# Altium PCB Bottom_Cell.PcbDoc
Units mm, origin at the board's own origin, x right, y up, seen from the top; angles counter-clockwise.
Board outline 257.2 x 91.2 mm, 4 copper layers (L1, L2, L3, L4), stack 0.603 mm thick; 151 components, 82 nets, 413 pads, 0 vias.
Unrouted connection lines stored in the file: 311.
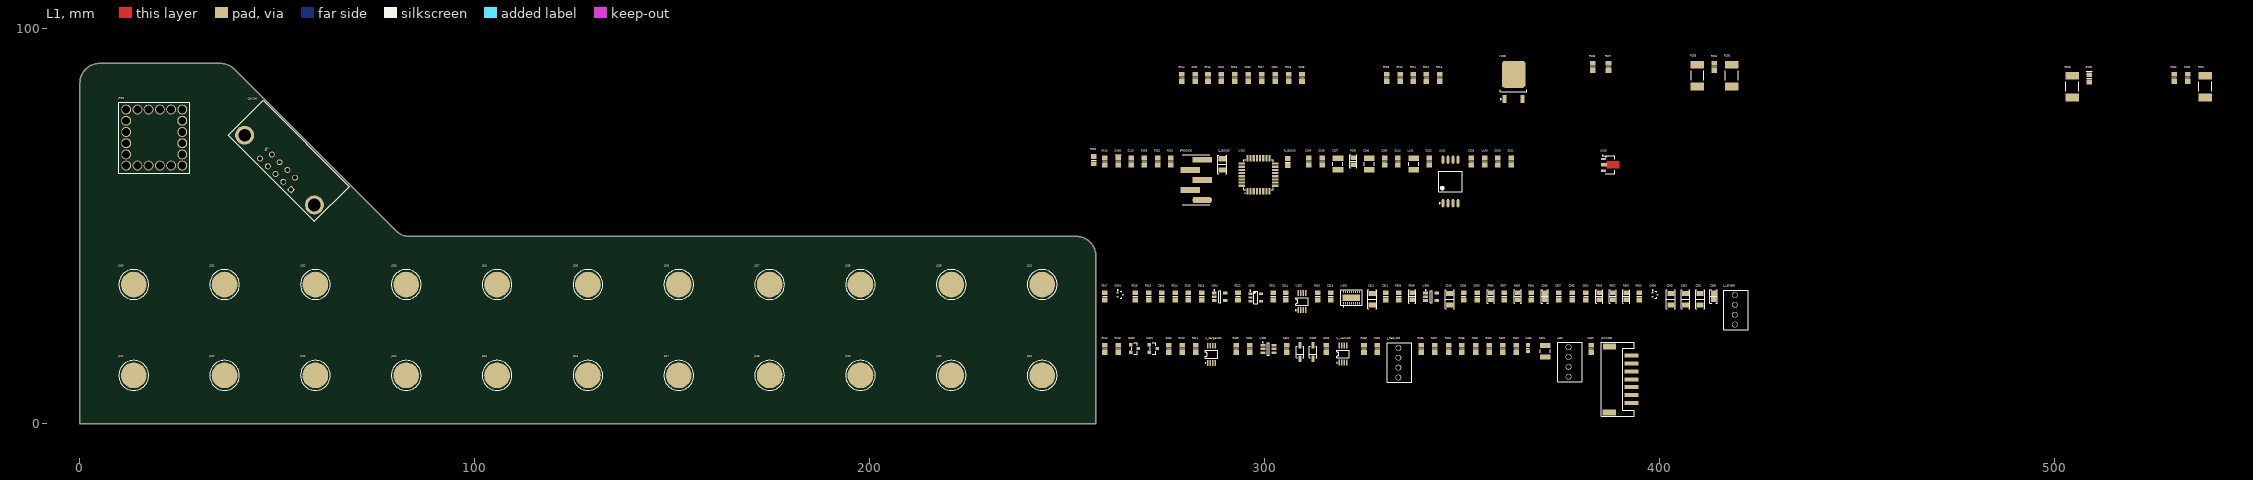
[diagram p0: L1 view]
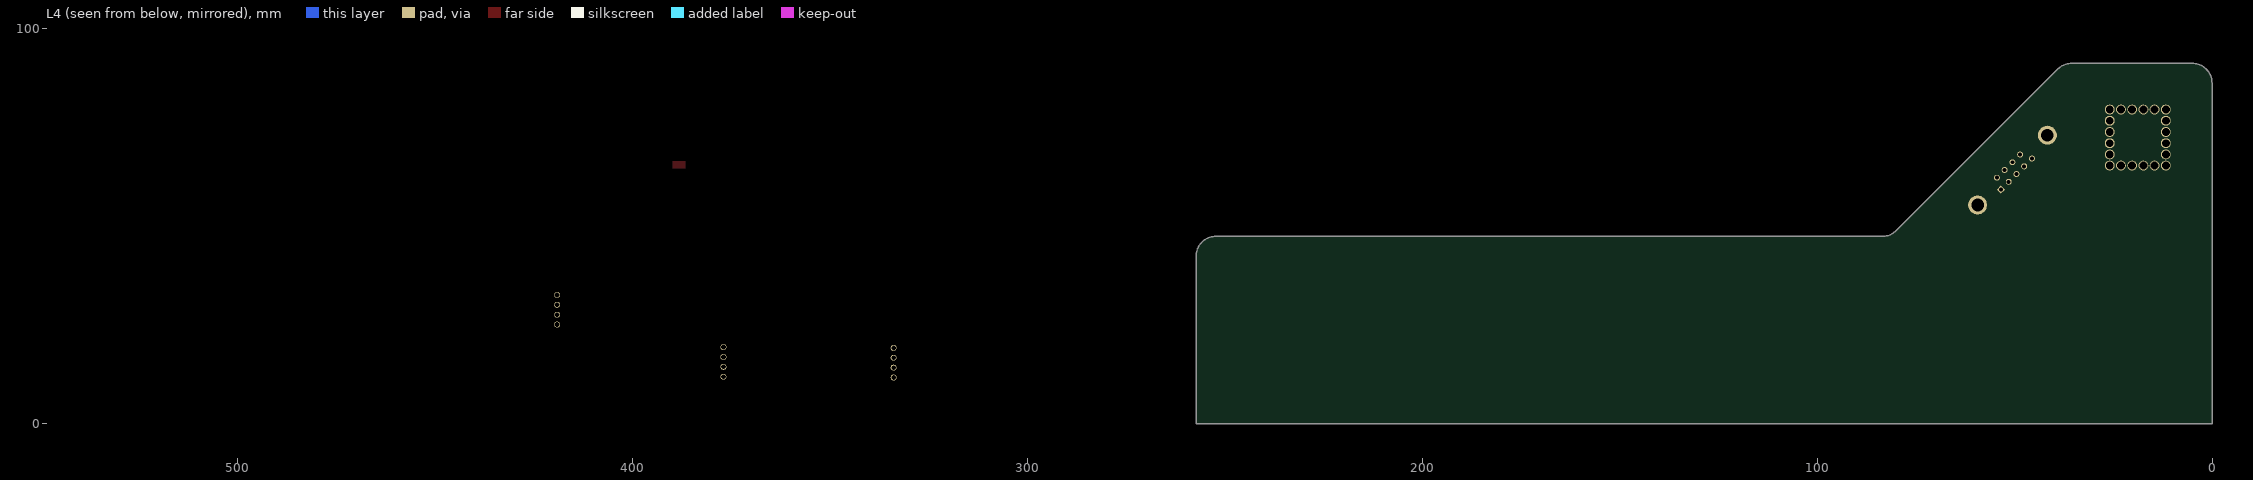
[diagram p1: L4 view, seen from below]
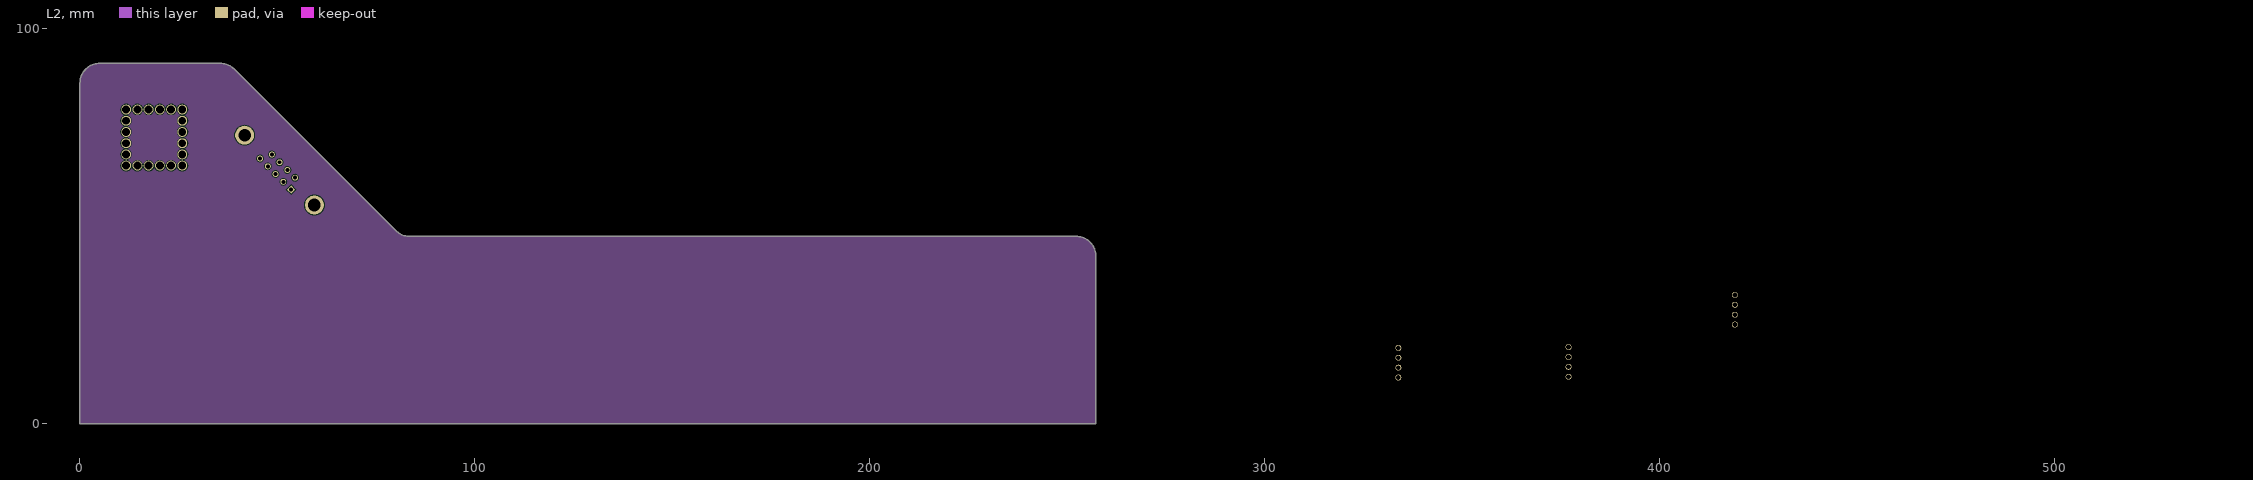
[diagram p2: L2]
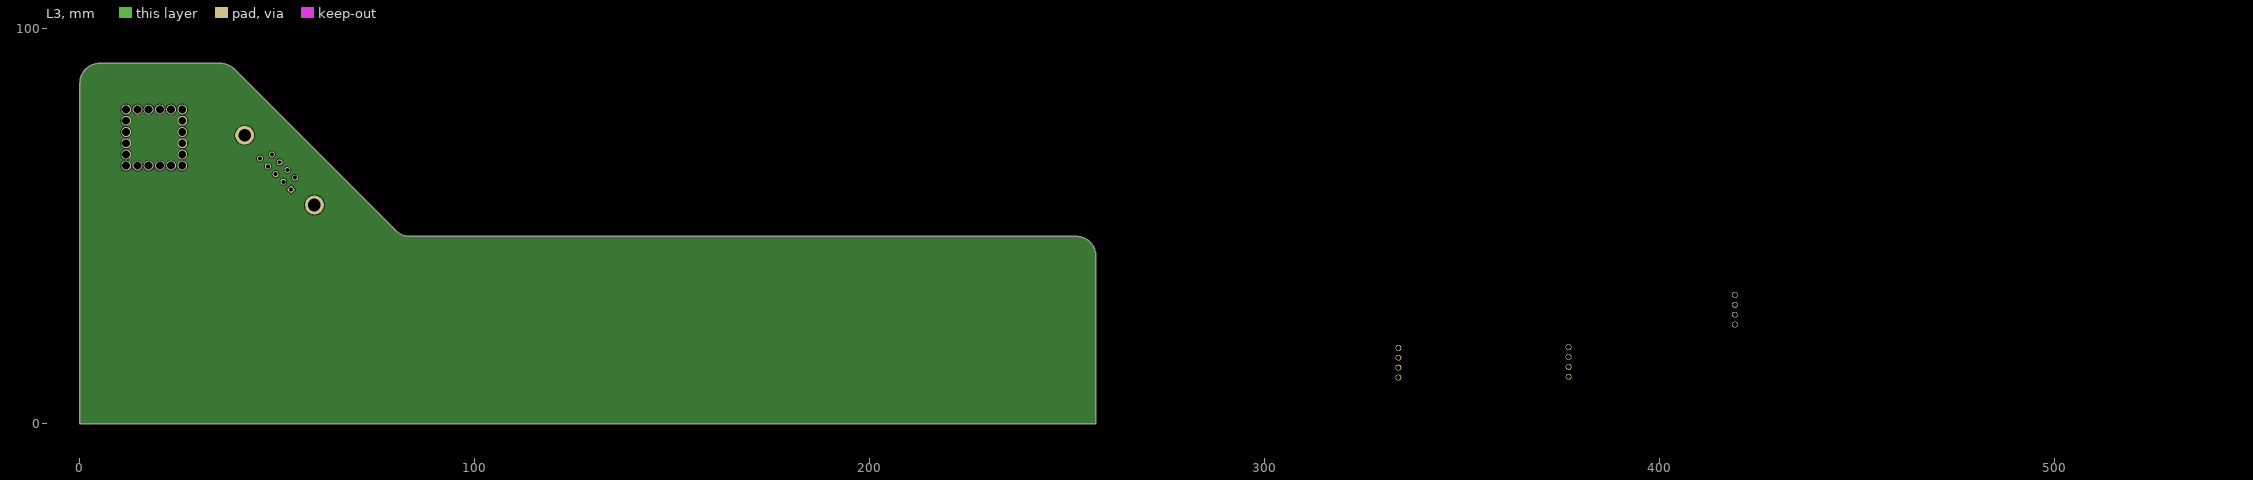
[diagram p3: L3]

## Layer stack, top to bottom
Top Solder: solder mask 0.0102, Solder Resist, Dk 3.5
L1: signal copper 0.0356
Dielectric 2: prepreg 0.0711, PP-006, Dk 4.1
L2: signal copper 0.035
Dielectric 1: dielectric 0.32, FR-4, Dk 4.8
L3: signal copper 0.035
Dielectric 3: prepreg 0.0711, PP-006, Dk 4.1
L4: signal copper 0.0356
Bottom Solder: solder mask 0.0102, Solder Resist, Dk 3.5

## Board outline
0,0 0,86.2 cw(c5,86.2) 5,91.2 35.529,91.2 cw(c35.529,86.2) 39.064,89.736 79.935,48.864 ccw(c83.471,52.4) 83.471,47.4 252.2,47.4 cw(c252.2,42.4) 257.2,42.4 257.2,0

## Design rules (kind name [scope] priority, off if disabled: settings)
Clearance [All] p1: gap=0.2 ignorepadtopadclearanceinfootprint=FALSE except(0: Arc-Hole Track-Hole SMDPad-Hole THPad-Hole Via-Hole Fill-Hole Poly-Hole Region-Hole Text-Hole; 0.1: SMDPad-SMDPad)
Height [All] p1: minheight=0 maxheight=60 prefheight=15
HoleSize [All] p1: absolutevalues=TRUE maxlimit=6 minlimit=0.2 maxpercent=80.000 minpercent=20.000
PolygonConnect [All] p1: connectstyle=Relief reliefconductorwidth=0.254 reliefentries=4 polygonreliefangle="90 Angle" airgapwidth=0.254
RoutingVias [All] p1: holewidth=0.711 width=1.27 viastyle="Through Hole" minholewidth=0.711 minwidth=1.27 maxholewidth=0.711 maxwidth=1.27
SilkToSilkClearance [All] p1: silktosilkclearance=0.15
SolderMaskExpansion [All] p1: expansion=0.102 istentingtop=FALSE
Width [All] p1: maxlimit=0.254 minlimit=0.254 preferedwidth=0.254
27 further rules are at their usual default settings.

## Components (designator, comment, footprint, x,y, rotation, side; value= is the part's Value field where it differs from the comment)
C100 "C0805C105K3RAC7210" CAPC2012N 358.987,66.306 r90 top value=1µF
C101 "C0805C105K3RAC7210" CAPC2012N 362.387,66.306 r90 top value=1µF
C102 "C0805C104K1RACAUTO" CAPC2012N 341.587,66.306 r90 top value=100nF
C103 "C0805C104K1RACAUTO" CAPC2012N 352.287,66.306 r90 top value=100nF
C104 "C0805C105K3RAC7210" CAPC2012N 333.687,66.306 r90 top value=1µF
C105 "C0805C104K1RACAUTO" CAPC2012N 330.287,66.306 r90 top value=100nF
C106 "C1210C106K3RACAUTO" CAPC3225N 326.387,65.706 r90 top value=10µF
C107 "C1210C106K3RACAUTO" CAPC3225N 318.487,65.706 r90 top value=10µF
C108 "C0805C104K1RACAUTO" CAPC2012N 314.487,66.306 r90 top value=100nF
C109 "C0805C104K1RACAUTO" CAPC2012N 311.087,66.306 r90 top value=100nF
C110 "C0805C103K1RAC7025" CAPC2012N 266.187,66.306 r90 top value=10nF
C200 "C0805C104K1RACAUTO" CAPC2012N 533.586,87.506 r90 top value=100nF
C201 "C0805C104K1RACAUTO" CAPC2012N 282.387,87.506 r90 top value=100nF
C202 "C0805C104K1RACAUTO" CAPC2012N 288.987,87.506 r90 top value=100nF
C203 "C0805C104K1RACAUTO" CAPC2012N 295.787,87.506 r90 top value=100nF
C204 "C0805C104K1RACAUTO" CAPC2012N 302.587,87.506 r90 top value=100nF
C205 "C0805C104K1RACAUTO" CAPC2012N 309.387,87.506 r90 top value=100nF
C300 "1 µF" "CAP 0805_2012" 413.586,32.207 r90 top
C301 "10 µF" "CAP 1206_3216 - 0.8MM" 410.186,31.507 r90 top
C302 "10 µF" "CAP 1206_3216 - 0.8MM" 406.486,31.507 r90 top
C303 "10 µF" "CAP 1206_3216 - 0.8MM" 402.786,31.507 r90 top
C304 "C0805C104K1RACAUTO" CAPC2012N 381.286,32.207 r90 top value=100nF
C305 "CL21B104KACNNNC" CAPC2012N 377.786,32.207 r90 top value=100nF
C306 "1 µF" "CAP 0805_2012" 370.887,32.207 r90 top
C307 "C0805C104K1RACAUTO" CAPC2012N 374.387,32.207 r90 top value=100nF
C308 "CL21B104KACNNNC" CAPC2012N 350.287,32.207 r90 top value=100nF
C309 "C0805C103K1RAC7025" CAPC2012N 353.787,32.207 r90 top value=10nF
C310 "10 µF" "CAP 1206_3216 - 0.8MM" 346.787,31.507 r90 top
C311 "CL21B104KACNNNC" CAPC2012N 330.587,32.207 r90 top value=100nF
C312 "10 µF" "CAP 1206_3216 - 0.8MM" 327.187,31.507 r90 top
C313 "CL21B104KACNNNC" CAPC2012N 316.687,32.207 r90 top value=100nF
C314 "C0805C102K1RACAUTO" CAPC2012N 305.287,32.207 r90 top value=1nF
C315 "C0805C103K1RAC7025" CAPC2012N 280.587,32.207 r90 top value=10nF
C316 "C0805C104K1RACAUTO" CAPC2012N 273.887,32.207 r90 top value=100nF
C400 "C0805C103K1RAC7025" CAPC2012N 382.586,18.907 r90 top value=10nF
C401 "C1210C106K3RACAUTO" CAPC3225N 370.987,18.307 r90 top value=10µF
C402 "CL21B104KACNNNC" CAPC2012N 328.487,18.907 r90 top value=100nF
C403 "C0805C102K1RACAUTO" CAPC2012N 315.587,18.907 r90 top value=1nF
C404 "CL21B104KACNNNC" CAPC2012N 305.487,18.907 r90 top value=100nF
C405 "CL21B104KACNNNC" CAPC2012N 296.187,18.907 r90 top value=100nF
C406 "C0805C102K1RACAUTO" CAPC2012N 275.687,18.907 r90 top value=1nF
C_ISO100 "100 pF" "CAP 1206_3216 - 0.8MM" 289.187,65.606 r90 top
CAN100 "CAN_D9 M" 618009211721 52.829,66.487 r135 top
D100 "LTST-C170GKT" DIO2012N-G 262.887,66.306 r90 top value=GRN
D200 "LTST-C170KRKT" DIO2012N-R 508.686,87.406 r90 top value=RED
D300 "MMBZ5226BT-7-F" "DIODES SOT-523" 398.786,32.607 r0 top
D301 "MMBZ5226BT-7-F" "DIODES SOT-523" 263.387,32.607 r0 top
D400 "SMD210PL-TP" SOD123 312.187,18.107 r90 top value="850mV @ 2A"
D401 "SMD210PL-TP" SOD123 308.887,18.107 r90 top value="850mV @ 2A"
F400 "0440005.WR" CAPC1608N 366.587,19.107 r90 top value=12mOhm
IC400 "DMG3418L-7" "DIODES SOT-23-3" 266.987,19.007 r0 top
IC401 "DMG3418L-7" "DIODES SOT-23-3" 271.687,19.007 r0 top
J200 "2036-3-57-15-00-00-03-0" "6mm Pad"#1 13.6,35.2 r0 top
J201 "2036-3-57-15-00-00-03-0" "6mm Pad"#1 36.6,35.2 r0 top
J202 "2036-3-57-15-00-00-03-0" "6mm Pad"#1 59.6,35.2 r0 top
J203 "2036-3-57-15-00-00-03-0" "6mm Pad"#1 82.6,35.2 r0 top
J204 "2036-3-57-15-00-00-03-0" "6mm Pad"#1 105.6,35.2 r0 top
J205 "2036-3-57-15-00-00-03-0" "6mm Pad"#1 128.6,35.2 r0 top
J206 "2036-3-57-15-00-00-03-0" "6mm Pad"#1 151.6,35.2 r0 top
J207 "2036-3-57-15-00-00-03-0" "6mm Pad"#1 174.6,35.2 r0 top
J208 "2036-3-57-15-00-00-03-0" "6mm Pad"#1 197.6,35.2 r0 top
J209 "2036-3-57-15-00-00-03-0" "6mm Pad"#1 220.6,35.2 r0 top
J210 "2036-3-57-15-00-00-03-0" "6mm Pad"#2 243.6,35.2 r0 top
J211 "2036-3-57-15-00-00-03-0" "6mm Pad"#1 13.6,12.2 r0 top
J212 "2036-3-57-15-00-00-03-0" "6mm Pad"#1 36.6,12.2 r0 top
J213 "2036-3-57-15-00-00-03-0" "6mm Pad"#1 59.6,12.2 r0 top
J214 "2036-3-57-15-00-00-03-0" "6mm Pad"#1 82.6,12.2 r0 top
J215 "2036-3-57-15-00-00-03-0" "6mm Pad"#1 105.6,12.2 r0 top
J216 "2036-3-57-15-00-00-03-0" "6mm Pad"#1 128.6,12.2 r0 top
J217 "2036-3-57-15-00-00-03-0" "6mm Pad"#1 151.6,12.2 r0 top
J218 "2036-3-57-15-00-00-03-0" "6mm Pad"#1 174.6,12.2 r0 top
J219 "2036-3-57-15-00-00-03-0" "6mm Pad"#1 197.6,12.2 r0 top
J220 "2036-3-57-15-00-00-03-0" "6mm Pad"#1 220.6,12.2 r0 top
J221 "2036-3-57-15-00-00-03-0" "6mm Pad"#1 243.6,12.2 r0 top
J400 "0022041041" 0022041041 376.887,15.607 r90 top value="4 Pos"
J_LEM300 "0022041041" 0022041041 418.986,28.807 r90 top value="4 Pos"
J_Relay400 "0022041041" 0022041041 333.787,15.407 r90 top value="4 Pos"
JOUT400 "S7B-PH-SM4-TB(LF)(SN)" JST-PH-S7 392.786,11.207 r90 top
JPOS "S98979" S98979 18.8,72.4 r0 top (schematic designator JPOS200)
JPROG100 "3-647167-5" "HDR1X5 SMT" 282.587,61.706 r90 top
L100 "742792022" INDC2012N 355.687,66.306 r90 top value=220@100MHz
L101 "BRL3225T100K" INDC3225N 337.687,65.706 r90 top value=10uH
M200 "AOD454A" TO252-3N 362.986,86.506 r90 top value="30mOhm @ 10V"
R100 "120 Ohms" "RES 0805_2012" 322.387,66.406 r90 top
R101 "ERJ-6ENF1002V" RESC2012N 276.187,66.306 r90 top value=10k
R102 "ERJ-6ENF1001V" RESC2012N 272.887,66.306 r90 top value=1k
R103 "ERJ-6ENF1001V" RESC2012N 269.487,66.306 r90 top value=1k
R104 "ERJ-6ENF1002V" RESC2012N 259.487,66.306 r90 top value=10k
R200 "ERJ-6ENF4993V" RESC2012N 256.687,66.707 r90 top value=499k
R201 "35221R0JT" RESC6432N 538.086,85.306 r90 top value=1
R202 "ERJ-6ENF1004V" RESC2012N 530.186,87.506 r90 top value=1Meg
R203 "35221R0JT" RESC6432N 504.386,85.306 r90 top value=1
R204 "ERJ-6ENF1002V" RESC2012N 413.786,90.306 r90 top value=10k
R205 "35221R0JT" RESC6432N 418.186,88.106 r90 top value=1
R206 "35221R0JT" RESC6432N 409.486,88.106 r90 top value=1
R207 "ERJ-6ENF10R0V" RESC2012N 386.986,90.306 r90 top value=10
R208 "ERJ-6ENF1002V" RESC2012N 382.987,90.307 r90 top value=10k
R209 "ERJ-6ENF1003V" RESC2012N 330.787,87.506 r90 top value=100k
R210 "ERJ-6ENF1003V" RESC2012N 334.287,87.506 r90 top value=100k
R211 "ERJ-6ENF1003V" RESC2012N 337.587,87.506 r90 top value=100k
R212 "ERJ-6ENF1003V" RESC2012N 340.887,87.506 r90 top value=100k
R213 "ERJ-6ENF1003V" RESC2012N 344.287,87.506 r90 top value=100k
R214 "NT08105F4050B1F" RESC2012N 278.987,87.506 r90 top value=100k
R215 "NT08105F4050B1F" RESC2012N 285.587,87.506 r90 top value=100k
R216 "NT08105F4050B1F" RESC2012N 292.387,87.506 r90 top value=100k
R217 "NT08105F4050B1F" RESC2012N 299.187,87.506 r90 top value=100k
R218 "NT08105F4050B1F" RESC2012N 305.987,87.506 r90 top value=100k
R300 "ERJ-6ENF1001V" RESC2012N 394.786,32.207 r90 top value=1k
R301 "604 kOhms" "RES 0805_2012" 391.486,32.207 r90 top
R302 "200 Ohms" "RES 0805_2012" 388.086,32.207 r90 top
R303 "52.3 kOhms" "RES 0805_2012" 384.686,32.207 r90 top
R304 "ERJ-6ENF1002V" RESC2012N 367.487,32.207 r90 top value=10k
R305 "150 kOhms" "RES 0805_2012" 363.987,32.207 r90 top
R306 "52.3 kOhms" "RES 0805_2012" 357.187,32.207 r90 top
R307 "ERJ-6ENF1002V" RESC2012N 360.587,32.207 r90 top value=10k
R308 "604 kOhms" "RES 0805_2012" 337.287,32.207 r90 top
R309 "ERJ-6ENF1001V" RESC2012N 333.887,32.207 r90 top value=1k
R310 "ERJ-6ENF1003V" RESC2012N 313.387,32.207 r90 top value=100k
R311 "ERJ-6ENF1002V" RESC2012N 302.087,32.207 r90 top value=10k
R312 "ERJ-6ENF1000V" RESC2012N 293.187,32.207 r90 top value=100
R313 "ERJ-6ENF3002V" RESC2012N 283.987,32.207 r90 top value=30k
R314 "ERJ-6ENF3002V" RESC2012N 277.287,32.207 r90 top value=30k
R315 "ERJ-6ENF3002V" RESC2012N 267.187,32.207 r90 top value=30k
R316 "ERJ-6ENF2002V" RESC2012N 270.587,32.207 r90 top value=20k
R317 "ERJ-6ENF1001V" RESC2012N 259.487,32.207 r90 top value=1k
R400 "ERJ-6ENF1003V" RESC2012N 360.187,18.907 r90 top value=100k
R401 "ERJ-6ENF1003V" RESC2012N 363.687,18.907 r90 top value=100k
R402 "ERJ-6ENF10R0V" RESC2012N 353.387,18.907 r90 top value=10
R403 "ERJ-6ENF10R0V" RESC2012N 356.787,18.907 r90 top value=10
R404 "ERJ-6ENF1003V" RESC2012N 346.487,18.907 r90 top value=100k
R405 "ERJ-6ENF1003V" RESC2012N 349.887,18.907 r90 top value=100k
R406 "ERJ-6ENF10R0V" RESC2012N 339.587,18.907 r90 top value=10
R407 "ERJ-6ENF10R0V" RESC2012N 342.987,18.907 r90 top value=10
R408 "ERJ-6ENF1003V" RESC2012N 325.087,18.907 r90 top value=100k
R409 "ERJ-6ENF1003V" RESC2012N 292.687,18.907 r90 top value=100k
R410 "ERJ-6ENF10R0V" RESC2012N 279.087,18.907 r90 top value=10
R411 "ERJ-6ENF10R0V" RESC2012N 282.487,18.907 r90 top value=10
R412 "ERJ-6ENF1002V" RESC2012N 259.487,18.907 r90 top value=10k
R413 "ERJ-6ENF1002V" RESC2012N 262.887,18.907 r90 top value=10k
R_ISO100 "ERJ-6ENF1004V" RESC2012N 305.787,66.206 r90 top value=1Meg
U100 "AP7381-50Y-13" "DIODES INC SOT-89" 386.186,65.506 r0 top
U101 "ADM3050EBRIZ" SOIC-8-300 346.987,61.306 r90 top
U102 "ATSAMC21E18A-ANT" SAMC21 298.387,63.006 r0 top
U300 "AZV331KTR-G1" SOT23-5N 342.087,32.107 r0 top
U301 "LTC3265HDHC#PBF" DHC 321.887,31.907 r0 top
U302 "74AHC2G00DP,125" TSSOP-8 309.387,30.907 r0 top
U303 "LM321MFX/NOPB" "TI SOT-23-5 DBV" 297.687,31.907 r0 top
U304 "LMV321SN3T1G" SOT23-5N 288.587,32.107 r0 top
U400 "SN74LVC1G11DBVR" SOT23-6N 300.887,18.907 r0 top
U_danger400 "74AHC2G00DP,125" TSSOP-8 286.487,17.507 r0 top
U_warn400 "74AHC2G00DP,125" TSSOP-8 319.787,17.607 r0 top

## Footprints (in the part's own frame and the unit in brackets; to place one, negate y for a bottom-side part, rotate by r counter-clockwise, add the part's x,y. Pads: shape width x height; smd on the part's side, far side on the other; paste and mask are expansions set on the pad)
"6mm Pad"#1 [mm] "Pad, 6mm"
  round 6.5 smd mask+0.508: 1(0,0)
  silkscreen extent -3.78,-3.77 3.78,3.77, body extent -3,-3 3,3, height 1.4
"6mm Pad"#2 [mm] "Pad, 6mm"
  round 6.5 smd mask+0.508: 1(0,-0.007)
  silkscreen extent -3.78,-3.77 3.78,3.77, body extent -3,-3 3,3, height 1.4
0022041041 [mm] "Header, Molex 4 Pos"
  round 1.5 hole 1.2 unplated mask+0.15: 1(-3.75,0) 2(-1.25,0) 3(1.25,0) 4(3.75,0)
  silkscreen extent -5,-3.4 5,2.8, body extent -4.75,-3.2 4.75,2.6, height 11.7
618009211721 [mm] "9 pins, right angled, 8.08mm, board lock & UNC4-40 rivet without hex screw"
  rect 1.5x1.5 hole 1: 1(-5.54,4.69)
  round 1.5 hole 1: 2(-2.77,4.69) 3(0,4.69) 4(2.77,4.69) 5(5.54,4.69) 6(-4.155,1.85) 7(-1.385,1.85) 8(1.385,1.85) 9(4.155,1.85)
  round 4.8 hole 3.2: M1(-12.5,3.27) M2(12.5,3.27)
  silkscreen extent -15.4,-6.25 15.4,6.25, body extent -15.41,-12.25 15.4,6.25, height 12.55
"CAP 0805_2012" [mm] "Chip Capacitor, 2-Leads, Body 2.00x1.20mm, IPC Medium Density"
  rect 1.3x1.4 smd: 1(-0.8,0) 2(0.8,0)
  silkscreen extent -1.7,-0.9 1.7,0.9, body extent -1,-0.64 1,0.64, height 1.26
"CAP 1206_3216 - 0.8MM" [mm] "Chip Capacitor, 2-Leads, Body 3.25x1.60mm, IPC Medium Density"
  rect 1.3x1.8 smd: 1(-1.45,0) 2(1.45,0)
  silkscreen extent -2.37,-1.12 2.37,1.12, body extent -1.6,-0.8 1.6,0.8, height 0.8
CAPC1608N [mm] "Chip Capacitor, Body 1.6x0.8mm, IPC Medium Density"
  rect 1x0.95 smd: 1(-0.8,0) 2(0.8,0)
  silkscreen extent 0,-0.4 0,0.4, body extent -0.8,-0.4 0.8,0.4, height 1.1
CAPC2012N [mm] "Chip Capacitor, Body 2.0x1.3mm, IPC Medium Density"
  rect 1.2x1.4 smd: 1(-0.9,0) 2(0.9,0)
  silkscreen extent 0,-0.6 0,0.6, body extent -1.07,-0.7 1.07,0.7, height 0.7
CAPC3225N [mm] "Chip Capacitor Body 3.2x2.5mm, IPC Medium Density"
  rect 1.3x2.7 smd: 1(-1.45,0) 2(1.45,0)
  silkscreen extent -0.4,-1.25 0.4,1.25, body extent -1.67,-1.32 1.67,1.32, height 1.5
DHC [mm] "Supply, Bipolar, +/-15V 18 pin"
  rect 0.25x0.65 smd: 1(-2,-1.45) 2(-1.5,-1.45) 3(-1,-1.45) 4(-0.5,-1.45) 5(0,-1.45) 6(0.5,-1.45) 7(1,-1.45) 8(1.5,-1.45) 9(2,-1.45) 10(2,1.45) 11(1.5,1.45) 12(1,1.45) 13(0.5,1.45) 14(0,1.45) 15(-0.5,1.45) 16(-1,1.45) 17(-1.5,1.45) 18(-2,1.45)
  rect 4.4x1.65 smd: 19(0,0)
  silkscreen extent -2.75,-2.34 2.75,2, body extent -2.55,-1.55 2.55,1.55, height 0.75
DIO2012N-G [mm] "Chip Diode, Body 2.0x1.2mm, Medium Density"
  rect 1.2x1.4 smd: 1(-0.9,0) 2(0.9,0)
  silkscreen extent 0,-0.76 1.78,0.76, body extent -1.07,-0.7 1.07,0.7, height 0.7
DIO2012N-R [mm] "Chip Diode, Body 2.0x1.2mm, Medium Density"
  rect 1.2x1.4 smd: 1(-0.9,0) 2(0.9,0)
  silkscreen extent 0,-0.76 1.78,0.76, body extent -1.07,-0.7 1.07,0.7, height 0.7
"DIODES INC SOT-89" [mm] "SOT89, 3-Leads, Body 4.50x2.50mm, Pitch 1.50mm, Lead Span 3.3mm, IPC Medium Density"
  rect 1.3x0.55 smd: 1(-0.45,1.5) 3(-0.45,-1.5)
  rect 1.475x0.8 smd: 2(-0.362,0)
  L1 region: 0.35,0.925 3.5,0.925 3.5,-0.925 0.35,-0.925
  silkscreen extent -0.75,-2.3 2.4,2.47, body extent -0.87,-2.25 3.28,2.25, height 1.5
"DIODES SOT-23-3" [mm] "SOT23, 3-Leads, Body 2.90x2.40mm, Pitch 0.95mm, IPC Medium Density"
  rect 0.9x0.8 smd: 1(-1,0.95) 2(-1,-0.95) 3(1,0)
  silkscreen extent -0.7,-1.45 0.7,1.45, body extent -1.41,-1.45 1.41,1.45, height 1.5
"DIODES SOT-523" [mm] "SOT523, 3-Leads, Body 0.8x1.60mm, Pitch 0.50mm, IPC Medium Density"
  rect 0.51x0.4 smd: 1(-0.65,0.5) 2(0.65,0) 3(-0.65,-0.5)
  silkscreen extent -0.77,-0.85 0.42,1.27, body extent -0.81,-0.8 0.81,0.8, height 0.82
"HDR1X5 SMT" [mm] "Connector; Header; Surface Mounted; 5 Position"
  oct 1.5x5 smd: 1(-5.08,-1.52)
  rect 1.5x5 smd: 2(-2.54,1.52) 3(0,-1.52) 4(2.54,1.52) 5(5.08,-1.52)
  silkscreen extent -6.36,-3.5 6.36,3.5, body extent -6.36,-3.55 6.36,2.85, height 10.67
INDC2012N [mm] "Chip Inductor, Body 2.0x1.3mm, IPC Medium Density"
  rect 1.2x1.4 smd: 1(-0.9,0) 2(0.9,0)
  silkscreen extent 0,-0.6 0,0.6, body extent -1.07,-0.7 1.07,0.7, height 0.65
INDC3225N [mm] "Chip Inductor, Body 3.2x2.5mm, IPC Medium Density"
  rect 1.3x2.7 smd: 1(-1.45,0) 2(1.45,0)
  silkscreen extent -0.4,-1.25 0.4,1.25, body extent -1.7,-1.35 1.7,1.35, height 1.5
JST-PH-S7 [mm] "Locking Connector; Side-Entry; Header; 7-Pin, 2mm pitch"
  rect 1x3.5 smd: 1(-6,0) 2(-4,0) 3(-2,0) 4(0,0) 5(2,0) 6(4,0) 7(6,0)
  rect 1.5x3.4 smd: 8(-8.382,5.588) 9(8.35,5.55)
  silkscreen extent -9.4,-0.76 9.4,7.62, body extent -8.95,-1.49 8.95,7.11, height 5.5
"RES 0805_2012" [mm] "Chip Resistor, 2-Leads, Body 2.00x1.25mm, IPC Medium Density"
  rect 1.15x1.35 smd: 1(-0.875,0) 2(0.875,0)
  silkscreen extent -1.7,-0.9 1.7,0.9, body extent -1,-0.62 1,0.63, height 0.6
RESC2012N [mm] "Chip Resistor, Body 2.0x1.2mm, IPC Medium Density"
  rect 1.2x1.4 smd: 1(-0.9,0) 2(0.9,0)
  silkscreen extent 0,-0.6 0,0.6, body extent -1.07,-0.7 1.07,0.7, height 0.7
RESC6432N [mm] "Chip Resistor, Body 6.4x3.2mm, IPC Medium Density"
  rect 2x3.4 smd: 1(-2.75,0) 2(2.75,0)
  silkscreen extent -1.2,-1.6 1.2,1.6, body extent -3.3,-1.7 3.3,1.7, height 1.2
S98979 [mm] "20 Pin Shank Terminal M8 Through Hole"
  round 2.5 hole 2: 1(-7.1,-7.1) 1(-7.1,-4.26) 1(-7.1,-1.42) 1(-7.1,1.42) 1(-7.1,4.26) 1(-7.1,7.1) 1(-4.26,-7.1) 1(-4.26,7.1) 1(-1.42,-7.1) 1(-1.42,7.1) 1(1.42,-7.1) 1(1.42,7.1) 1(4.26,-7.1) 1(4.26,7.1) 1(7.1,-7.1) 1(7.1,-4.26) 1(7.1,-1.42) 1(7.1,1.42) 1(7.1,4.26) 1(7.1,7.1)
  silkscreen extent -9,-9 9,9, body extent -7.7,-7.7 7.7,7.7, height 31.5
SAMC21 [mm] "Microchip TQFP-32"
  rect 0.55x1.65 smd: 1(-2.8,-4.2) 2(-2,-4.2) 3(-1.2,-4.2) 4(-0.4,-4.2) 5(0.4,-4.2) 6(1.2,-4.2) 7(2,-4.2) 8(2.8,-4.2) 17(2.8,4.2) 18(2,4.2) 19(1.2,4.2) 20(0.4,4.2) 21(-0.4,4.2) 22(-1.2,4.2) 23(-2,4.2) 24(-2.8,4.2)
  rect 1.65x0.55 smd: 9(4.2,-2.8) 10(4.2,-2) 11(4.2,-1.2) 12(4.2,-0.4) 13(4.2,0.4) 14(4.2,1.2) 15(4.2,2) 16(4.2,2.8) 25(-4.2,2.8) 26(-4.2,2) 27(-4.2,1.2) 28(-4.2,0.4) 29(-4.2,-0.4) 30(-4.2,-1.2) 31(-4.2,-2) 32(-4.2,-2.8)
  silkscreen extent -3.75,-4.75 3.75,3.75, body extent -4.5,-4.5 4.5,4.5, height 1.2
SOD123 [mm] "SOD-123; 2 Leads; Body 2.7 x 1.6 mm, (LxW)"
  rect 1.6x0.85 smd: 1(1.7,0) 2(-1.7,0)
  silkscreen extent -1.45,-0.9 1.45,0.9, body extent -1.95,-0.9 1.95,0.9, height 1.18
SOIC-8-300 [mm] "Stretched SOIC, 8-Leads, Body 5.85x6.8mm, Pitch 1.27mm, IPC Medium Density"
  oval 2.1x0.65 smd: 1(-5.5,1.905) 2(-5.5,0.635) 3(-5.5,-0.635) 4(-5.5,-1.905) 5(5.5,-1.905) 6(5.5,-0.635) 7(5.5,0.635) 8(5.5,1.905)
  silkscreen extent -5.62,-2.95 2.6,2.95, body extent -3.4,-2.95 3.4,2.95, height 3.2
SOT23-5N [mm] "SOT23, 5-Leads, Body 2.9x1.6mm, Pitch 0.95mm, Lead Span 2.8mm, IPC Medium Density"
  rect 1.2x0.65 smd: 1(-1.4,0.95) 2(-1.4,0) 3(-1.4,-0.95) 4(1.4,-0.95) 5(1.4,0.95)
  silkscreen extent -1.5,-1.55 0.25,1.75, body extent -1.5,-1.5 1.5,1.5, height 1.45
SOT23-6N [mm] "SOT23, 6-Leads, Body 2.9x1.6mm, Pitch 0.95mm, Lead Span 2.8mm, IPC Medium Density"
  rect 1.2x0.65 smd: 1(-1.4,0.95) 2(-1.4,0) 3(-1.4,-0.95) 4(1.4,-0.95) 5(1.4,0) 6(1.4,0.95)
  silkscreen extent -1.5,-1.55 0.25,1.75, body extent -1.5,-1.5 1.5,1.5, height 1.45
"TI SOT-23-5 DBV" [mm] "SOT23, 5-Leads, Body 2.90x2.80mm, Pitch 0.95mm, IPC Medium Density"
  rect 1x0.55 smd: 1(-1.35,0.95) 2(-1.35,0) 3(-1.35,-0.95) 4(1.35,-0.95) 5(1.35,0.95)
  silkscreen extent -1.47,-1.55 0.5,1.9, body extent -1.44,-1.43 1.39,1.48, height 1.5
TO252-3N [mm] "D-PAK, 4-Leads, Body 6.1x6.5mm, Pitch 2.28mm, Lead Span 9.7mm, IPC Medium Density"
  rect 2x1 smd: 1(-4.35,2.28) 3(-4.35,-2.28)
  rrect25% 6.8x6 smd: 2(1.9,0)
  silkscreen extent -4.47,-3.35 -2,3.43, body extent -5.01,-3.27 4.93,3.27, height 2.36
TSSOP-8 [mm] "Shrink Small Outline; 8 Leads; Body Width 3.0 mm; Pitch 0.65 mm"
  rect 0.4x1.5 smd: 1(-0.975,-2.2) 2(-0.325,-2.2) 3(0.325,-2.2) 4(0.975,-2.2) 5(0.975,2.2) 6(0.325,2.2) 7(-0.325,2.2) 8(-0.975,2.2)
  silkscreen extent -1.65,-2.3 1.55,1, body extent -1.55,-2.5 1.55,2.5, height 1.09

## Part data
C100 C101 C104: "Capacitor, Ceramic, 1µF, 25V, 0805, 10%, 125C", Supplier Part Number 1=399-C0805C105K3RAC7210CT-ND, Temp=125C, Category=C, Rated=25V, Supplier 1=Digi-Key, Tol=10%
C102 C103 C105 C108 C109 C200 C201 C202 C203 C204 C205 C304 C307 C316: "Capacitor, Ceramic, 100nF, 100V, 0805, 10%, 125C", Supplier Part Number 1=399-6926-1-ND, Temp=125C, Category=C, Rated=100V, Supplier 1=Digi-Key, Tol=10%
C106 C107 C401: "Capacitor, Ceramic, 10µF, 25V, 0805, 10%, 125C", Supplier Part Number 1=399-7046-1-ND, Temp=125C, Category=C, Rated=25V, Supplier 1=Digi-Key, Tol=10%
C110 C309 C315 C400: "Capacitor, Ceramic, 10nF, 100V, 0805, 10%, 125C", Supplier Part Number 1=399-C0805C103K1RAC7025CT-ND, Temp=125C, Category=C, Rated=100V, Supplier 1=Digi-Key, Tol=10%
C300 C306: library part GRM21BC72A105KE01L, "CAP CER 1UF 100V X7S 0805", Device Package="0805 (2012 Metric)", manufacturer="Murata Electronics", Operating Temperature="-55°C ~ 125°C", Supplier Part Number 1=490-14464-1-ND, Temperature Coefficient=X7S, Tolerance=±10%, Voltage - Rated=100V, Applications="General Purpose", Capacitance="1 µF", componentlink1description=Datasheet, componentlink1url=https://search.murata.co.jp/Ceramy/image/img/A01X/G101/ENG/GRM21BC72A105KE01-01.pdf, componentlink2description="DigiKey Link", componentlink2url=https://www.digikey.com/en/products/detail/murata-electronics/GRM21BC72A105KE01L/6606093, lastupdated="1/31/2023 8:11:09 PM", Lifecycle Status=Active, Minimum Order=1, Mounting Type="Surface Mount, MLCC", Package / Case="0805 (2012 Metric)", packaging=TapeAndReel, Part Number=GRM21BC72A105KE01L, Part Status=Active, partid=8550, price=0.07, series=GRM, Size / Dimension="0.079\" L x 0.049\" W (2.00mm x 1.25mm)", Supplier 1=DigiKey, Thickness (Max)="0.057\" (1.45mm)"
C301 C302 C303 C310 C312: library part 1206X106K250CT, "CAP CER 10UF 25V X5R 1206", Device Package="1206 (3216 Metric)", manufacturer="Walsin Technology Corporation", Operating Temperature="-55°C ~ 85°C", Supplier Part Number 1=1292-1206X106K250CT-ND, Temperature Coefficient=X5R, Tolerance=±10%, Voltage - Rated=25V, Applications="General Purpose", Capacitance="10 µF", componentlink1description=Datasheet, componentlink1url=https://www.passivecomponent.com/wp-content/uploads/datasheet/WTC_MLCC_General_Purpose.pdf, componentlink2description="DigiKey Link", componentlink2url=https://www.digikey.com/en/products/detail/walsin-technology-corporation/1206X106K250CT/14836856, lastupdated="1/31/2023 8:12:49 PM", Lifecycle Status=Active, Minimum Order=1, Mounting Type="Surface Mount, MLCC", Package / Case="1206 (3216 Metric)", packaging=TapeAndReel, Part Number=1206X106K250CT, Part Status=Active, partid=45632, price=0.10, series=-, Size / Dimension="0.126\" L x 0.063\" W (3.20mm x 1.60mm)", Supplier 1=DigiKey, Thickness (Max)="0.075\" (1.90mm)"
C305 C308 C311 C313 C402 C404 C405: library part C0805C104K1RACAUTO, "Capacitor, Ceramic, 100nF, 25V, 0805, 10%, 125C", Supplier Part Number 1=1276-1099-1-ND, Temp=125C, Category=C, Rated=100V, Supplier 1=Digi-Key, Tol=10%
C314 C403 C406: "Capacitor, Ceramic, 1nF, 100V, 0805, 10%, 125C", Supplier Part Number 1=399-6919-1-ND, Temp=125C, Category=C, Rated=100V, Supplier 1=Digi-Key, Tol=10%
C_ISO100: library part CL31C101JIFNFNE, "CAP CER 100PF 1KV C0G/NP0 1206", Device Package="1206 (3216 Metric)", manufacturer="Samsung Electro-Mechanics", Operating Temperature="-55°C ~ 125°C", Supplier Part Number 1=1276-3199-1-ND, Temperature Coefficient="C0G, NP0", Tolerance=±5%, Voltage - Rated="1000V (1kV)", Applications="General Purpose", Capacitance="100 pF", componentlink1description=Datasheet, componentlink1url=http://www.samsungsem.com/kr/support/product-search/mlcc/CL31C101JIFNFNE.jsp, componentlink2description="DigiKey Link", componentlink2url=https://www.digikey.com/en/products/detail/samsung-electro-mechanics/CL31C101JIFNFNE/3888857, lastupdated="2/4/2023 8:13:04 PM", Lifecycle Status=Active, Minimum Order=1, Mounting Type="Surface Mount, MLCC", Package / Case="1206 (3216 Metric)", packaging=TapeAndReel, Part Number=CL31C101JIFNFNE, Part Status=Active, partid=22341, price=0.05, series=CL, Size / Dimension="0.126\" L x 0.063\" W (3.20mm x 1.60mm)", Supplier 1=DigiKey, Thickness (Max)="0.055\" (1.40mm)"
CAN100: library part CMP-1502-00292-1, "Male PCB Connector without Hex Screw WR-DSUB, 8.08 mm, Angled, 9 pins", Contact Resistance=30mOhm, manufacturer="Wurth Elektronik", Operating Temperature=-40to85degC, Package Reference=618009211721, Rated Current=3A, Working Voltage=125VAC, Datasheet URL=https://katalog.we-online.de/em/datasheet/6180xx211721.pdf, Gender=Male, Manufacturer URL=http://www.we-online.de, Mounting Technology=THT, Orientation=Angled, packaging=Tray, Part Number=618009211721, Pin Number=9, Publisher=WurthElektronik
D100: "LED, SMT 0805, Green, 2.1V, 10mA", Supplier Part Number 1=160-1179-1-ND, Category=D, Rated="2.1V, 10mA, 6mcd", Supplier 1=Digi-Key
D200: "LED, SMT 0805, Red, 2.0V, 20mA", Supplier Part Number 1=160-1415-1-ND, Category=D, Rated="2.0V, 20mA, 54mcd", Supplier 1=Digi-Key
D300 D301: "DIODE ZENER 3.3V 150MW SOT523", Current - Reverse Leakage @ Vr="25 µA @ 1 V", manufacturer="Diodes Incorporated", Operating Temperature="-65°C ~ 150°C", Package / Case=SOT-523, Power - Max="150 mW", Supplier Part Number 1=MMBZ5226BTDICT-ND, Tolerance=±5%, Voltage - Forward (Vf) (Max) @ If="900 mV @ 10 mA", Voltage - Zener (Nom) (Vz)="3.3 V", componentlink1description=Datasheet, componentlink1url=https://www.diodes.com/assets/Datasheets/ds30267.pdf, componentlink2description="DigiKey Link", componentlink2url=https://www.digikey.com/en/products/detail/diodes-incorporated/MMBZ5226BT-7-F/2095654, Impedance (Max) (Zzt)="28 Ohms", lastupdated="1/31/2023 8:49:11 PM", Lifecycle Status=Active, Minimum Order=1, Mounting Type="Surface Mount", packaging=TapeAndReel, Part Number=MMBZ5226BT-7-F, Part Status=Active, partid=790, price=0.05, series=-, Supplier 1=DigiKey, Supplier Device Package=SOT-523
D400 D401: library part SMD210PL, "Diode, Si Sch, 100V, 2A, SOD123", Supplier Part Number 1=SMD210PL-TPMSCT-ND, Temp=125C, Category=D, Rated="2A, 100V", Supplier 1=Digi-Key
F400: "Fuse, SMT, 5A, 32VAC/VDC, 1206", Supplier Part Number 1=F1608CT-ND, Temp=150C, Category=F, Rated="5A, 32V", Supplier 1=Digi-Key
IC400 IC401: "MOSFET N-CH 30V 4A SOT23", Current - Continuous Drain (Id) @ 25°C="4A (Ta)", Drain to Source Voltage (Vdss)="30 V", Drive Voltage (Max Rds On,  Min Rds On)="2.5V, 10V", Input Capacitance (Ciss) (Max) @ Vds="464.3 pF @ 15 V", manufacturer="Diodes Incorporated", Operating Temperature="-55°C ~ 150°C (TJ)", Package / Case="TO-236-3, SC-59, SOT-23-3", Power Dissipation (Max)="1.4W (Ta)", Supplier Device Package=SOT-23-3, Supplier Part Number 1=DMG3418L-7DICT-ND, componentlink1description=Datasheet, componentlink1url=https://www.diodes.com/assets/Datasheets/DMG3418L.pdf, componentlink2description="DigiKey Link", componentlink2url=https://www.digikey.com/en/products/detail/diodes-incorporated/DMG3418L-7/4810932, FET Type=N-Channel, Gate Charge (Qg) (Max) @ Vgs="5.5 nC @ 4.5 V", lastupdated="2/2/2023 9:00:08 PM", Lifecycle Status=Active, Minimum Order=1, Mounting Type="Surface Mount", packaging=TapeAndReel, Part Number=DMG3418L-7, Part Status=Active, price=0.10, Rds On (Max) @ Id, Vgs="60mOhm @ 4A, 10V", series=-, Supplier 1=DigiKey, Technology="MOSFET (Metal Oxide)", Vgs (Max)=±12V, Vgs(th) (Max) @ Id="1.5V @ 250µA"
J200 J201 J202 J203 J204 J205 J206 J207 J208 J209 J210 J211 J212 J213 J214 J215 J216 J217 J218 J219 J220 J221: "Hardware, Sprint Contact Surface", Supplier Part Number 1=54-2036-3-57-15-00-00-03-0CT-ND, Supplier 1=Digi-Key
J400 J_LEM300 J_Relay400: "Header, 4 pos, 2.5mm pitch, Molex / Kit Parts / Housing: 0511910400 / Terminals: 0508028000", Supplier Part Number 1=WM18787-ND, Temp=80C, Category=J, Rated=N/A, Supplier 1=Digi-Key, Tol=N/A
JOUT400: "Header, JST, 7-Pin, Right-Angle, PH, Surface Mount", Supplier Part Number 1=455-1754-1-ND, Category=J, Supplier 1=Digi-Key
JPOS: "Screw Terminal M8, 360A"
JPROG100: library part "Hdr 3-647167-5", "Header, 1x5-Pin, SMT, 100mil Pitch", Supplier Part Number 1=A144616-ND, Category=J, Supplier 1=Digi-Key
L100: "Inductor, 220 Ohms @ 100MHz, 2A, 50 mOhm, Ferrite Bead", Supplier Part Number 1=732-1614-1-ND, Category=L, Rated=2A, Supplier 1=Digi-Key
L101: "Inductor, 10uH, 700mA, 420mOhm, Ferrite Bead", Supplier Part Number 1=587-2167-1-ND, Category=L, Rated="700mA, 0.42 Ohm", Supplier 1=Digi-Key
M200: "MOSFET, N-Ch, 40V, 20A, 430mOhm, TO252", Supplier Part Number 1=785-1223-1-ND, Category=M, Rated="40V, 20A", Supplier 1=Digi-Key, Vgs(th)=3.0V
R100: library part RC0805FR-07120RL, "RES 120 OHM 1% 1/8W 0805", Device Package="0805 (2012 Metric)", manufacturer=Yageo, Operating Temperature="-55°C ~ 155°C", Power (Watts)="0.125W, 1/8W", Supplier Device Package=0805, Supplier Part Number 1=311-120CRCT-ND, Temperature Coefficient=±100ppm/°C, Tolerance=±1%, componentlink1description=Datasheet, componentlink1url=https://www.yageo.com/upload/media/product/productsearch/datasheet/rchip/PYu-RC_Group_51_RoHS_L_10.pdf, componentlink2description="DigiKey Link", componentlink2url=https://www.digikey.com/en/products/detail/yageo/RC0805FR-07120RL/727575, Composition="Thick Film", Features="Moisture Resistant", Height - Seated (Max)="0.024\" (0.60mm)", lastupdated="2/3/2023 8:42:17 PM", Lifecycle Status=Active, Minimum Order=1, Number of Terminations=2, Package / Case="0805 (2012 Metric)", packaging=CutTape, Part Number=RC0805FR-07120RL, Part Status=Active, partid=39440, price=0.01, Resistance="120 Ohms", series=RC_L, Size / Dimension="0.079\" L x 0.049\" W (2.00mm x 1.25mm)", Supplier 1=DigiKey
R101 R104 R204 R208 R304 R307 R311 R412 R413: "Resistor, Fixed, 10 kOhm, 0805, 1%, 1/8W", Supplier Part Number 1=P10.0KCCT-ND, Category=R, Rated=1/8W, Supplier 1=Digi-Key, Tol=1%
R102 R103 R300 R309 R317: "Resistor, Fixed, 1 kOhm, 0805, 1%, 1/8W", Supplier Part Number 1=P1.00KCCT-ND, Category=R, Rated=1/8W, Supplier 1=Digi-Key, Tol=1%
R200: "Resistor, Fixed, 499 kOhm, 0805, 1%, 1/8W", Supplier Part Number 1=P499KCCT-ND, Category=R, Rated=1/8W, Supplier 1=Digi-Key, Tol=1%
R201 R203 R205 R206: "Resistor, Power, 1 Ohm, 6432, 5%, 3W", Supplier Part Number 1=A121177CT-ND, Category=R, Rated=3W, Supplier 1=Digi-Key, Tol=5%
R202 R_ISO100: "Resistor, Fixed, 1 MOhm, 0805, 1%, 1/8W", Supplier Part Number 1=P1.00MCCT-ND, Category=R, Rated=1/8W, Supplier 1=Digi-Key, Tol=1%
R207 R402 R403 R406 R407 R410 R411: "Resistor, Fixed, 10 Ohm, 0805, 1%, 1/8W", Supplier Part Number 1=P10.0CCT-ND, Category=R, Rated=1/8W, Supplier 1=Digi-Key, Tol=1%
R209 R210 R211 R212 R213 R310 R400 R401 R404 R405 R408 R409: "Resistor, Fixed, 100 kOhm, 0805, 1%, 1/8W", Supplier Part Number 1=P100KCCT-ND, Category=R, Rated=1/8W, Supplier 1=Digi-Key, Tol=1%
R214 R215 R216 R217 R218: library part NTCS0805E3103FMT, "Resistor, NTC Thermistor, 100kOhm, 0805, 1%, 125C", Supplier Part Number 1=283-NT08105F4050B1FCT-ND, Temp=150C, Category=R, Rated=3570K, Supplier 1=DigiKey, Tol=1%
R301 R308: library part RMCF0805FT604K, "RES 604K OHM 1% 1/8W 0805", Device Package="0805 (2012 Metric)", manufacturer="Stackpole Electronics Inc", Operating Temperature="-55°C ~ 155°C", Power (Watts)="0.125W, 1/8W", Ratings=AEC-Q200, Supplier Device Package=0805, Supplier Part Number 1=738-RMCF0805FT604KCT-ND, Temperature Coefficient=±100ppm/°C, Tolerance=±1%, componentlink1description=Datasheet, componentlink1url=https://www.seielect.com/catalog/sei-rmcf_rmcp.pdf, componentlink2description="DigiKey Link", componentlink2url=https://www.digikey.com/en/products/detail/stackpole-electronics-inc/RMCF0805FT604K/1760364, Composition="Thick Film", Features="Automotive AEC-Q200", Height - Seated (Max)="0.026\" (0.65mm)", lastupdated="1/2/2023 8:44:07 PM", Lifecycle Status=Active, Minimum Order=1, Number of Terminations=2, Package / Case="0805 (2012 Metric)", packaging=CutTape, Part Number=RMCF0805FT604K, Part Status=Active, partid=38394, price=0.01, Resistance="604 kOhms", series=RMCF, Size / Dimension="0.079\" L x 0.049\" W (2.00mm x 1.25mm)", Supplier 1=DigiKey
R302: library part ERA-6AED201V, "RES 200 OHM 0.5% 1/8W 0805", Device Package="0805 (2012 Metric)", manufacturer="Panasonic Electronic Components", Operating Temperature="-55°C ~ 155°C", Power (Watts)="0.125W, 1/8W", Ratings=AEC-Q200, Supplier Device Package=0805, Supplier Part Number 1=P123819CT-ND, Temperature Coefficient=±25ppm/°C, Tolerance=±0.5%, componentlink1description=Datasheet, componentlink1url=https://industrial.panasonic.com/cdbs/www-data/pdf/RDM0000/AOA0000C307.pdf, componentlink2description="DigiKey Link", componentlink2url=https://www.digikey.com/en/products/detail/panasonic-electronic-components/ERA-6AED201V/9373598, Composition="Thin Film", Features="Automotive AEC-Q200", Height - Seated (Max)="0.024\" (0.60mm)", lastupdated="1/2/2023 8:43:38 PM", Lifecycle Status=Active, Minimum Order=1, Number of Terminations=2, Package / Case="0805 (2012 Metric)", packaging=TapeAndReel, Part Number=ERA-6AED201V, Part Status=Active, partid=45624, price=0.05, Resistance="200 Ohms", series=ERA-6A, Size / Dimension="0.079\" L x 0.049\" W (2.00mm x 1.25mm)", Supplier 1=DigiKey
R303 R306: library part RMCF0805FT52K3, "RES 52.3K OHM 1% 1/8W 0805", Device Package="0805 (2012 Metric)", manufacturer="Stackpole Electronics Inc", Operating Temperature="-55°C ~ 155°C", Power (Watts)="0.125W, 1/8W", Ratings=AEC-Q200, Supplier Device Package=0805, Supplier Part Number 1=RMCF0805FT52K3CT-ND, Temperature Coefficient=±100ppm/°C, Tolerance=±1%, componentlink1description=Datasheet, componentlink1url=https://www.seielect.com/catalog/sei-rmcf_rmcp.pdf, componentlink2description="DigiKey Link", componentlink2url=https://www.digikey.com/en/products/detail/stackpole-electronics-inc/RMCF0805FT52K3/1760139, Composition="Thick Film", Features="Automotive AEC-Q200", Height - Seated (Max)="0.026\" (0.65mm)", lastupdated="1/2/2023 8:44:08 PM", Lifecycle Status=Active, Minimum Order=1, Number of Terminations=2, Package / Case="0805 (2012 Metric)", packaging=CutTape, Part Number=RMCF0805FT52K3, Part Status=Active, partid=38093, price=0.01, Resistance="52.3 kOhms", series=RMCF, Size / Dimension="0.079\" L x 0.049\" W (2.00mm x 1.25mm)", Supplier 1=DigiKey
R305: library part ERA-6AEB154V, "RES 150K OHM 0.1% 1/8W 0805", Device Package="0805 (2012 Metric)", manufacturer="Panasonic Electronic Components", Operating Temperature="-55°C ~ 155°C", Power (Watts)="0.125W, 1/8W", Ratings=AEC-Q200, Supplier Device Package=0805, Supplier Part Number 1=P150KDACT-ND, Temperature Coefficient=±25ppm/°C, Tolerance=±0.1%, componentlink1description=Datasheet, componentlink1url=https://industrial.panasonic.com/cdbs/www-data/pdf/RDM0000/AOA0000C307.pdf, componentlink2description="DigiKey Link", componentlink2url=https://www.digikey.com/en/products/detail/panasonic-electronic-components/ERA-6AEB154V/1465801, Composition="Thin Film", Features="Automotive AEC-Q200", Height - Seated (Max)="0.024\" (0.60mm)", lastupdated="1/2/2023 8:43:14 PM", Lifecycle Status=Active, Minimum Order=1, Number of Terminations=2, Package / Case="0805 (2012 Metric)", packaging=TapeAndReel, Part Number=ERA-6AEB154V, Part Status=Active, partid=48804, price=0.04, Resistance="150 kOhms", series=ERA-6A, Size / Dimension="0.079\" L x 0.049\" W (2.00mm x 1.25mm)", Supplier 1=DigiKey
R312: "Resistor, Fixed, 100 Ohm, 0805, 1%, 1/8W", Supplier Part Number 1=P100CCT-ND, Category=R, Rated=1/8W, Supplier 1=Digi-Key, Tol=1%
R313 R314 R315: library part ERJ-6ENF2002V, "Resistor, Fixed, 30 kOhm, 0805, 1%, 1/8W", Supplier Part Number 1=P30.0KCCT-ND, Category=R, Rated=1/8W, Supplier 1=Digi-Key, Tol=1%
R316: "Resistor, Fixed, 20 kOhm, 0805, 1%, 1/8W", Supplier Part Number 1=P20.0KCCT-ND, Category=R, Rated=1/8W, Supplier 1=Digi-Key, Tol=1%
U100: "IC REG LINEAR 5V 150MA SOT89", Current - Output=150mA, Current - Quiescent (Iq)="2.5 µA", Current - Supply (Max)="25 µA", manufacturer="Diodes Incorporated", Operating Temperature="-40°C ~ 125°C (TJ)", Package / Case=TO-243AA, Supplier Device Package=SOT-89-3, Supplier Part Number 1=AP7381-50Y-13DICT-ND, Voltage - Input (Max)=40V, Voltage - Output (Min/Fixed)=5V, Voltage Dropout (Max)="1V @ 100mA", componentlink1description=Datasheet, componentlink1url=https://www.diodes.com/assets/Datasheets/AP7381.pdf, componentlink2description="DigiKey Link", componentlink2url=https://www.digikey.com/en/products/detail/diodes-incorporated/AP7381-50Y-13/7914855, lastupdated="2/3/2023 9:04:39 PM", Lifecycle Status=Active, Minimum Order=1, Mounting Type="Surface Mount", Number of Regulators=1, Output Configuration=Positive, Output Type=Fixed, packaging=TapeAndReel, Part Number=AP7381-50Y-13, Part Status=Active, price=0.09, Protection Features="Current Limit, Thermal Shutdown", series=-, Supplier 1=DigiKey
U101: "IC, Transceiver, CAN FD, 0.5-6V, ISOLATED", Supplier Part Number 1=505-ADM3050EBRIZ-ND, Category=U, Supplier 1=Digi-Key
U102: library part ATSAMC21E, "ARM Microcontrollers - MCU 32TQFP,105C TEMP, GREEN, 5V, 48MHZ", Supplier Part Number 1=556-ATSAMC21E18A-ANT, Supplier 1=Mouser
U300: library part AZV331, "Comparator, Single, Open-Drain, 84mA, 2.2V~5.5V", Supplier Part Number 1=AZV331KTR-G1DICT-ND, Category=U, Rated=2.2V~5.5V, Supplier 1=Digi-Key
U301: library part LTC3265HDHC, "Supply, Bipolar Charge Pump, +/-15V", Supplier Part Number 1=584-LTC3265HDHC#PBF, Supplier 1=Mouser
U302 U_danger400 U_warn400: library part 74AHC2G00, "Logic, NAND, Dual, Schmitt Trigger, TSSOP-8", Supplier Part Number 1=1727-6521-1-ND, Category=U, Rated="5.5V, 24mA", Supplier 1=Digi-Key
U303: "IC OPAMP GP 1 CIRCUIT SOT23-5", Current - Input Bias=45nA, Current - Output / Channel=40mA, Current - Supply=660µA, Device Package="SC-74A, SOT-753", manufacturer="Texas Instruments", Operating Temperature="-40°C ~ 85°C", Supplier Device Package=SOT-23-5, Supplier Part Number 1=LM321MFX/NOPBCT-ND, Voltage - Input Offset=2mV, Voltage - Supply, Single/Dual (±)="3V ~ 30V, ±1.5V ~ 15V", Amplifier Type="General Purpose", componentlink1description=Datasheet, componentlink1url=http://www.ti.com/general/docs/suppproductinfo.tsp?distId=10&gotoUrl=http%3A%2F%2Fwww.ti.com%2Flit%2Fgpn%2Flm321, componentlink2description="DigiKey Link", componentlink2url=http://digikey.com/product-detail/en/texas-instruments/LM321MFX-NOPB/LM321MFX-NOPBCT-ND/3440175, Gain Bandwidth Product=1MHz, lastupdated="3/30/2020 3:10:59 PM", Lifecycle Status=Active, Minimum Order=1, Mounting Type="Surface Mount", Number of Circuits=1, Package / Case="SC-74A, SOT-753", packaging=TapeAndReel, Part Number=LM321MFX/NOPB, Part Status=Active, partid=11, price=0.23, series=-, Slew Rate=0.4V/µs, Supplier 1=DigiKey
U304: library part LMV321, "Op-Amp, Single, 1MHz, 1V/us, R2R, 2.7V~5.5V, 160mA", Supplier Part Number 1=LMV321SN3T1GOSCT-ND, Category=U, Rated="2.7V~5.5V, 160mA", Supplier 1=Digi-Key
U400: library part 74LVC1G11, "Logic, AND, Single, 3-In, SOT23-6", Supplier Part Number 1=296-16810-1-ND, Category=U, Rated="1.65 ~ 5.5V", Supplier 1=Digi-Key

## Nets (pads, with @x,y where several pads share a name; then routed paths per layer and width w, separated by ;. In a path a pad name is that pad's centre, name@x,y a point inside that pad or via, vN(x,y) a via of type N, cw(c..) or ccw(c..) an arc to the next point about the centre after c; other vN are vias at no path point)
5V_K: C100.1 C103.1 U100.1 U101.8
+12: D400.2 D401.2 J_Relay400.1 J_Relay400.4
+12V: C303.1 C400.1 C401.1 J400.1 R300.1 R317.1 U301.3 U301.4 U301.13
+12V_K: C101.1 CAN100.9 U100.3
+15V: C302.2 J_LEM300.4 R301.2 U301.17 U303.5
-15V: C312.2 J_LEM300.3 R308.1 U301.7 U303.2
/Danger: R402.1 U_danger400.5
/Danger_MCU: U102.1 U400.1 U_danger400.6 U_danger400.7
/IFLT: C309.2 R307.2 U300.4 U302.5
/OC: U102.16 U302.6 U302.7 U400.3
/RST: C314.1 C403.1 C406.1 R310.1 R408.1 R409.1 U102.15 U302.1 U_danger400.1 U_warn400.1
/Warn: R403.2 U_warn400.5
/Warn_MCU: U102.2 U_warn400.6 U_warn400.7
BAL: R207.2 U102.17
CAN: C308.2 R304.2 R305.1 U300.1
"CAN_ RX": U101.3 U102.24
"CAN_ TX": U101.2 U102.23
CANH: CAN100.7 R100.2 U101.7
CANL: CAN100.2 R100.1 U101.6
Dan_OUT: JOUT400.6 R400.1 R402.2
Gate: M200.1 R207.1 R208.2
GND: C316.2
GND_K: C100.2 C101.2 C103.2 C_ISO100.2 CAN100.3 R_ISO100.2 U100.2 U101.5
GR_Pack: IC400.1 R410.1 R412.2
GR_PC: IC401.1 R411.1 R413.2
HV_Relay_N: D400.1 IC401.3 J_Relay400.2
ISNS: R309.1 R311.1 U102.12 U304.4
ISNS_OUT: J_LEM300.2 R312.1
ISNS_RC: C311.1 R309.2 U300.3
LED: D100.1 U102.19
Main_CR: R410.2 U400.4
MAIN_CR_MCU: R102.2 U400.6
MCR: R102.1 U102.18
NetC104_2: C104.2 C105.2 U102.29
NetC106_1: C106.1 C108.1 L100.1 U102.9
NetC107_2: C107.2 C109.2 L101.2 U102.30
NetC110_1: C110.1 R101.2 U102.26
NetC300_1: C300.1 U301.2
NetC300_2: C300.2 U301.1
NetC301_1: C301.1 U301.11 U301.18
NetC304_1: C304.1 U301.15
NetC306_1: C306.1 U301.9
NetC306_2: C306.2 U301.10
NetC307_2: C307.2 U301.5
NetC310_1: C310.1 U301.8
NetC315_1: C315.1 R312.2 U303.1
NetD100_2: D100.2 R104.2
NetD200_2: D200.2 R204.2
NetD300_2: D300.2 R300.2 R304.1
NetD301_2: D301.2 R315.1 R317.2
NetJPROG100_2: JPROG100.2 U102.32
NetJPROG100_3: JPROG100.3 U102.31
NetM200_2: M200.2 R204.1 R206.1
NetR201_1: R201.1 R203.2
NetR203_1: R203.1 R205.2
NetR205_1: R205.1 R206.2
NetR301_1: R301.1 R303.2 U301.16
NetR302_2: R302.2 R305.2
NetR306_1: R306.1 R308.2 U301.6
NetR311_2: R311.2 R313.1 U304.3
NetR313_2: R313.2 U303.3 U303.4
NetR314_1: R314.1 R315.2 R316.2 U304.1
NetU302_2: U302.2 U302.3
NetU_danger400_2: U_danger400.2 U_danger400.3
NetU_warn400_2: U_warn400.2 U_warn400.3
PC_Relay_N: D401.1 IC400.3 J_Relay400.3
PCCR: R103.1 U102.20
PreChar_CR: R103.2 R411.2
SCL: R407.2 U102.22
SCL_OUT: JOUT400.3 R405.2 R407.1
SDA: R406.1 U102.21
SDA_OUT: JOUT400.4 R404.1 R406.2
TSNS1: C201.1 R209.1 R214.1 U102.3
TSNS2: C202.1 R210.1 R215.1 U102.4
TSNS3: C203.1 R211.1 R216.1 U102.5
TSNS4: C204.1 R212.1 R217.1 U102.6
TSNS5: C205.1 R213.1 R218.1 U102.7
VNEG: C102.1 C104.1 C105.1 C106.2 C107.1 C108.2 C109.1 C110.2 C200.2 C201.2 C202.2 C203.2 C204.2 C205.2 C301.2 C302.1 C303.2 C304.2 C305.2 C307.1 C308.1 C309.1 C310.2 C311.2 C312.1 C313.2 C314.2 C315.2 C400.2 C401.2 C402.2 C403.2 C404.2 C405.2 C406.2 C_ISO100.1 D300.1 D301.1 IC400.2 IC401.2 J200.1 J201.1 J202.1 J203.1 J204.1 J205.1 J206.1 J207.1 J208.1 J209.1 J210.1 J211.1 J212.1 J213.1 J214.1 J215.1 J216.1 J217.1 J218.1 J219.1 J220.1 J221.1 J400.3 J400.4 J_LEM300.1 JPOS.1 JPROG100.5 M200.3 R104.1 R202.1 R208.1 R214.2 R215.2 R216.2 R217.2 R218.2 R302.1 R303.1 R306.2 R314.2 R316.1 R412.1 R413.1 R_ISO100.1 U101.4 U102.10 U102.28 U300.2 U301.12 U301.14 U301.19 U302.4 U304.2 U400.2 U_danger400.4 U_warn400.4
VPOS: C102.2 C305.1 C313.1 C316.1 C402.1 C404.1 C405.1 D200.1 F400.2 JPROG100.1 L100.2 L101.1 R101.1 R200.2 R201.2 R209.2 R210.2 R211.2 R212.2 R213.2 R307.1 R310.2 R400.2 R401.1 R404.2 R405.1 R408.2 R409.2 U101.1 U300.5 U302.8 U304.5 U400.5 U_danger400.8 U_warn400.8
VPOS_F: F400.1 JOUT400.7
VSNS: C200.1 R200.1 R202.2 U102.8
Warn_OUT: JOUT400.5 R401.2 R403.1
pads on no net: CAN100.1 CAN100.4 CAN100.5 CAN100.6 CAN100.8 CAN100.M1 CAN100.M2 D300.3 D301.3 J400.2 JOUT400.1 JOUT400.2 JOUT400.8 JOUT400.9 JPROG100.4 U102.11 U102.13 U102.14 U102.25 U102.27

## Polygon pours and split planes (outlines as drawn)
no net on L1 (solid, pour order 5): 252.2,47.4 cw(c252.2,42.4) 257.2,42.4 257.2,0 0,0 0,86.382 cw(c0.077,86.38) 0,86.383 0,86.5 0.005,86.498 cw(c4.959,86.241) 5.1,91.2 35.529,91.2 cw(c35.529,86.201) 39.065,89.735 79.8,49 79.956,48.844 ccw(c83.421,52.28) 83.4,47.4
no net on L1 (solid, pour order 3): 252.2,47.4 cw(c252.2,42.4) 257.2,42.4 257.2,0 0,0 0,86.382 cw(c0.077,86.38) 0,86.383 0,86.5 0.005,86.498 cw(c4.959,86.241) 5.1,91.2 35.529,91.2 cw(c35.529,86.201) 39.065,89.735 79.8,49 79.956,48.844 ccw(c83.421,52.28) 83.4,47.4
no net on L2 (solid, pour order 4): 252.2,47.4 cw(c252.2,42.4) 257.2,42.4 257.2,0 0,0 0,86.382 cw(c0.077,86.38) 0,86.383 0,86.5 0.005,86.498 cw(c4.959,86.241) 5.1,91.2 35.529,91.2 cw(c35.529,86.201) 39.065,89.735 79.8,49 79.956,48.844 ccw(c83.421,52.28) 83.4,47.4
no net on L3 (solid, pour order 2): 252.2,47.4 cw(c252.2,42.4) 257.2,42.4 257.2,0 0,0 0,86.382 cw(c0.077,86.38) 0,86.383 0,86.5 0.005,86.498 cw(c4.959,86.241) 5.1,91.2 35.529,91.2 cw(c35.529,86.201) 39.065,89.735 79.8,49 79.956,48.844 ccw(c83.421,52.28) 83.4,47.4

## Silkscreen, mask and mechanical layers (free items; w line width, h text height)
Mechanical 1:
  circle w0.013: c243.6,35.2 r2.995
  circle w0.013: c25.1,23.7 r2.7
  circle w0.013: c94.1,23.7 r2.7
  circle w0.013: c232.1,23.7 r2.7
  circle w0.013: c163.1,23.7 r2.7
  circle w0.013: c11.7,65.3 r1
  circle w0.013: c14.54,65.3 r1
  circle w0.013: c20.22,65.3 r1
  circle w0.013: c25.9,65.3 r1
  circle w0.013: c20.22,79.5 r1
  circle w0.013: c14.54,79.5 r1
  circle w0.013: c25.9,76.66 r1
  circle w0.013: c11.7,70.98 r1
  circle w0.013: c11.7,76.66 r1
  circle w0.013: c25.9,70.98 r1
  circle w0.013: c25.9,68.14 r1
  circle w0.013: c25.9,73.82 r1
  circle w0.013: c11.7,73.82 r1
  circle w0.013: c11.7,68.14 r1
  circle w0.013: c11.7,79.5 r1
  circle w0.013: c17.38,79.5 r1
  circle w0.013: c23.06,79.5 r1
  circle w0.013: c23.06,65.3 r1
  circle w0.013: c17.38,65.3 r1
  circle w0.013: c25.9,79.5 r1
  circle w0.013: c243.6,12.2 r2.995
  circle w0.013: c220.6,12.2 r2.995
  circle w0.013: c220.6,35.2 r2.995
  circle w0.013: c197.6,12.2 r2.995
  circle w0.013: c197.6,35.2 r2.995
  circle w0.013: c174.6,12.2 r2.995
  circle w0.013: c174.6,35.2 r2.995
  circle w0.013: c151.6,12.2 r2.995
  circle w0.013: c151.6,35.2 r2.995
  circle w0.013: c128.6,12.2 r2.995
  circle w0.013: c128.6,35.2 r2.995
  circle w0.013: c105.6,12.2 r2.995
  circle w0.013: c105.6,35.2 r2.995
  circle w0.013: c82.6,12.2 r2.995
  circle w0.013: c82.6,35.2 r2.995
  circle w0.013: c59.6,12.2 r2.995
  circle w0.013: c59.6,35.2 r2.995
  circle w0.013: c36.6,12.2 r2.995
  circle w0.013: c36.6,35.2 r2.995
  circle w0.013: c25.1,23.7 r2.7
  circle w0.013: c163.1,23.7 r2.7
  circle w0.013: c232.1,23.7 r2.7
  circle w0.013: c94.1,23.7 r2.7
  circle w0.013: c13.6,35.2 r2.995
  circle w0.013: c13.6,12.2 r2.995
  lines w0.013: 0,0 257.2,0 ; 0,0 0,86.2 ; 0,0 257.2,0 ; 0,0 0,86.2 ; 0,86.2 cw(c5,86.2) 5,91.2 ; 0,86.2 cw(c5,86.2) 5,91.2 ; 5,91.2 35.529,91.2 ; 5,91.2 35.529,91.2 ; 35.529,91.2 cw(c35.529,86.2) 39.064,89.736 ; 35.529,91.2 cw(c35.529,86.2) 39.064,89.736 ; 39.064,89.736 79.935,48.864 ; 39.064,89.736 79.935,48.864 ; 79.935,48.864 ccw(c83.471,52.4) 83.471,47.4 ; 79.935,48.864 ccw(c83.471,52.4) 83.471,47.4 ; 83.471,47.4 252.2,47.4 ; 83.471,47.4 252.2,47.4 ; 252.2,47.4 cw(c252.2,42.4) 257.2,42.4 ; 252.2,47.4 cw(c252.2,42.4) 257.2,42.4 ; 257.2,0 257.2,42.4 ; 257.2,0 257.2,42.4 ; 8.5,4 8.5,38.9 23.1,38.9 23.1,30.095 ccw(c25.1,23.7) 23.1,17.305 23.1,4 8.5,4 ; 27.1,4 27.1,17.305 ccw(c25.1,23.7) 27.1,30.095 27.1,38.9 92.1,38.9 92.1,30.095 ccw(c94.1,23.7) 92.1,17.305 92.1,4 27.1,4 ; 96.1,4 96.1,17.305 ccw(c94.1,23.7) 96.1,30.095 96.1,38.9 161.1,38.9 161.1,30.095 ccw(c163.1,23.7) 161.1,17.305 161.1,4 96.1,4 ; 165.1,4 165.1,17.305 ccw(c163.1,23.7) 165.1,30.095 165.1,38.9 230.1,38.9 230.1,30.095 ccw(c232.1,23.7) 230.1,17.305 230.1,4 165.1,4 ; 234.1,4 234.1,17.305 ccw(c232.1,23.7) 234.1,30.095 234.1,38.9 248.7,38.9 248.7,4 234.1,4

## Text inside footprints (layer, text, board x,y; h text height)
CAN100: Top Overlay "9" at 47.865,69.443 h1.02 r135; Mechanical 2 "PCB Edge" at 60.642,69.351 h1.02 r135